# Altium PCB goalLight.PcbDoc
Units mil, origin at the board's own origin, x right, y up, seen from the top; angles counter-clockwise.
Board outline 6000 x 4000 mil, 2 copper layers (Top Layer, Bottom Layer); 32 components, 25 nets, 87 pads, 0 vias.
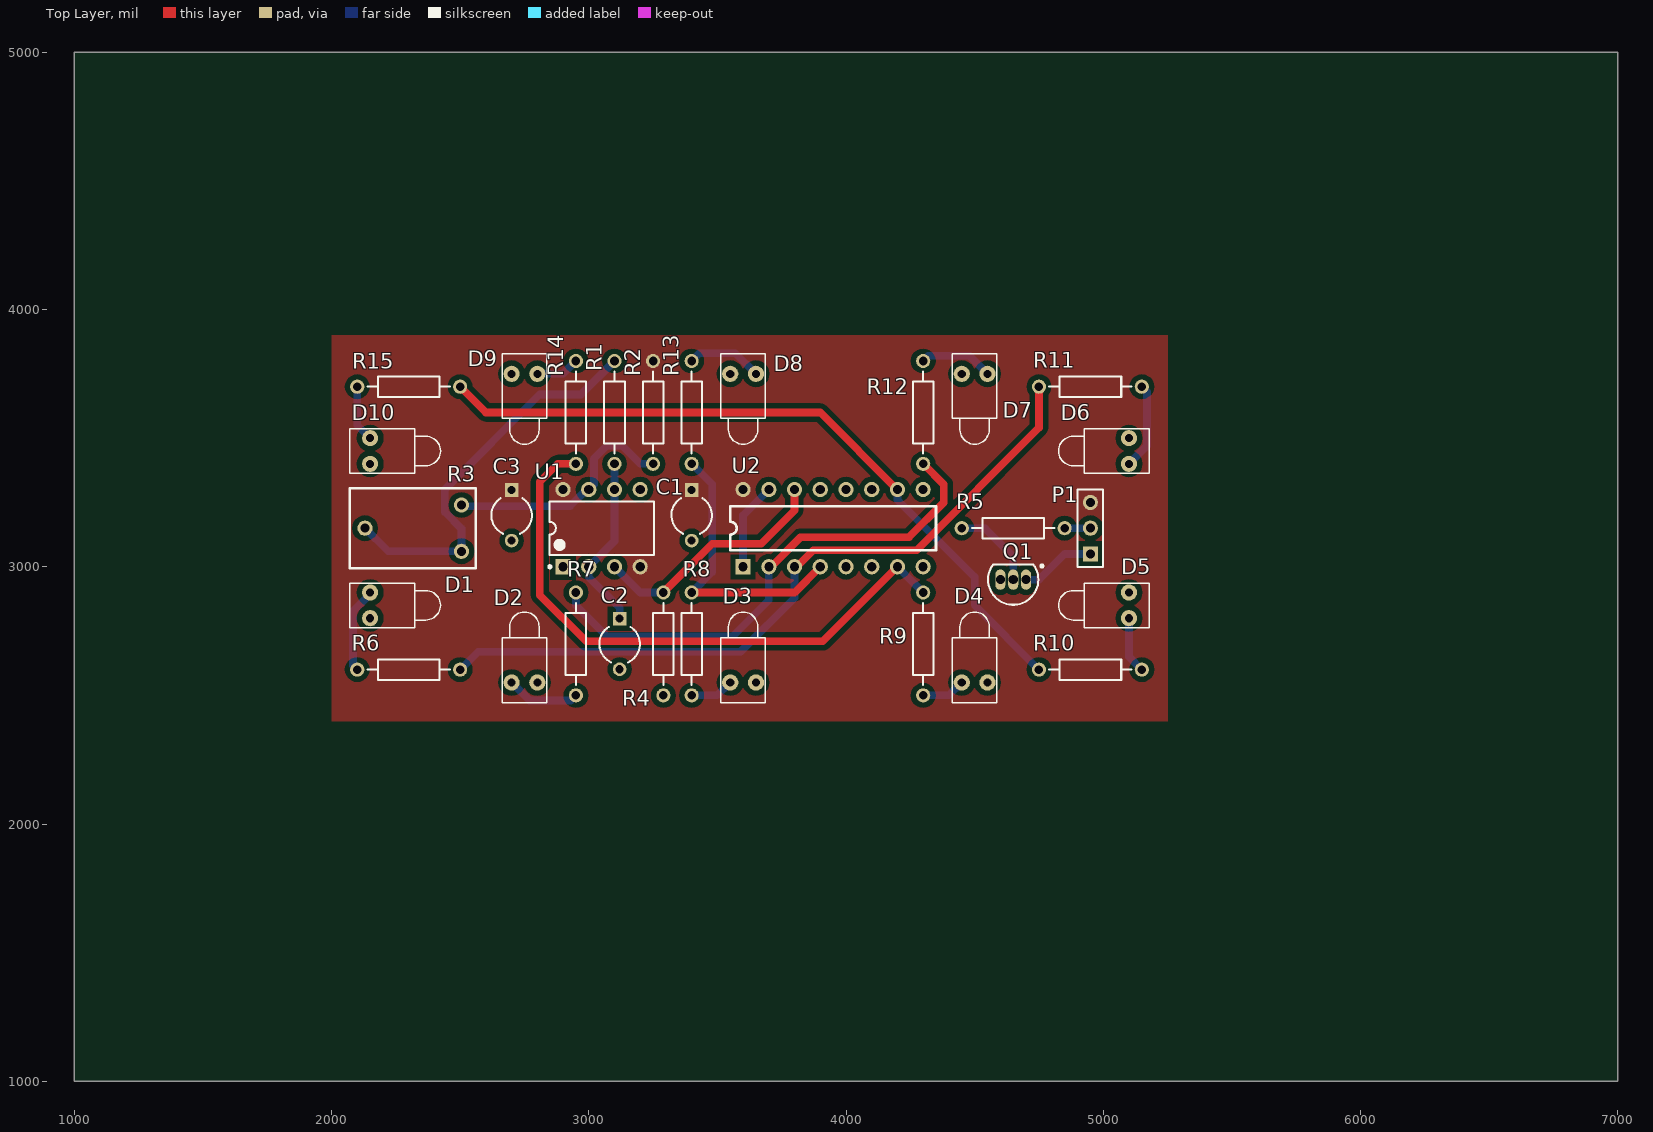
[diagram p0: Top Layer view]
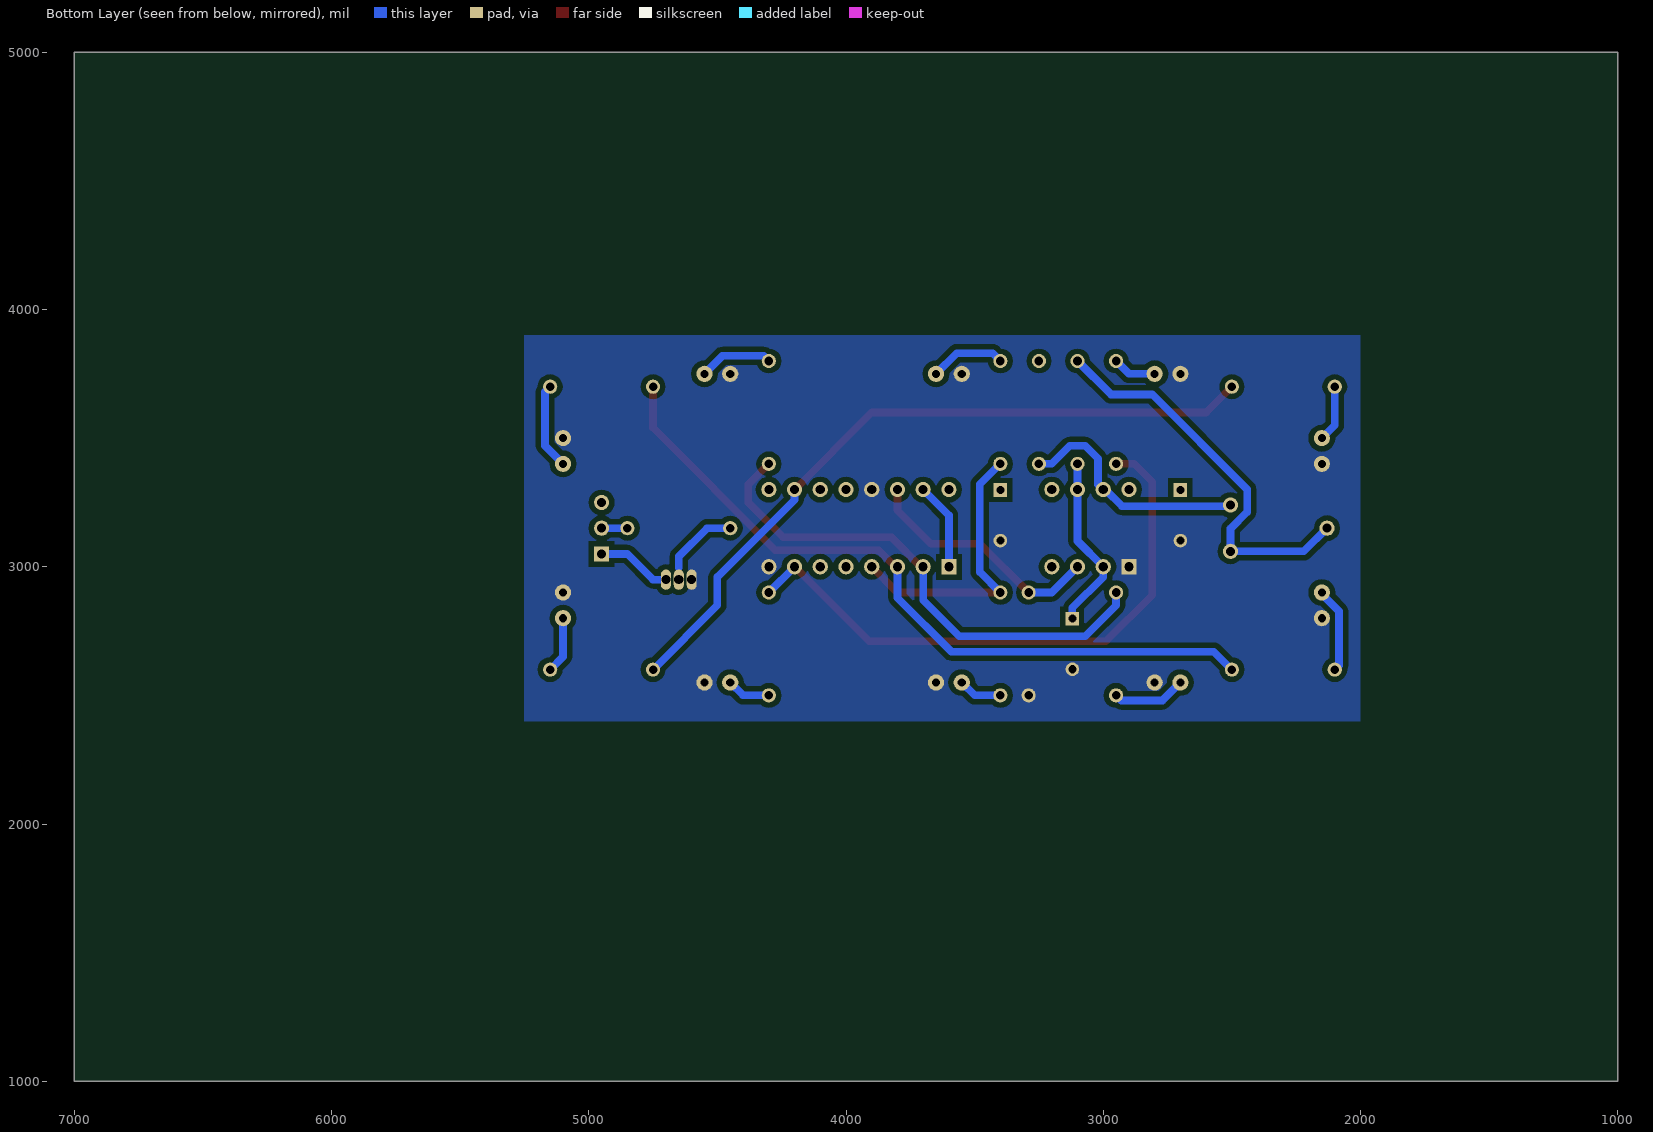
[diagram p1: Bottom Layer view, seen from below]

## Layer stack, top to bottom
Top Layer: signal copper 1.4
Dielectric: dielectric 12.6, FR-4, Dk 4.8
Bottom Layer: signal copper 1.4

## Board outline
1000,1000 7000,1000 7000,5000 1000,5000

## Design rules (kind name [scope] priority, off if disabled: settings)
Clearance [All] p1: gap=20
PlaneConnect [All] p1: planeconnectstyle=Direct reliefexpansion=20 reliefentries=4 reliefconductorwidth=10 reliefairgap=10
PolygonConnect [All] p1: connectstyle=Direct reliefconductorwidth=10 reliefentries=4 polygonreliefangle="90 Angle" airgapwidth=10
RoutingVias [All] p1: holewidth=28 width=50 viastyle="Through Hole" minholewidth=28 minwidth=50 maxholewidth=28 maxwidth=50
SilkscreenOverComponentPads [All] p1: minsilkscreentomaskgap=10
SolderMaskExpansion [All] p1: expansion=4
Width [All] p1: maxlimit=30 minlimit=30 preferedwidth=30
26 further rules are at their usual default settings.

## Components (designator, comment, footprint, x,y, rotation, side; value= is the part's Value field where it differs from the comment)
C1 "Cap2" CAPR5-4X5 3400,3200 r270 top
C2 "Cap2" CAPR5-4X5 3120,2700 r270 top
C3 "Cap2" CAPR5-4X5 2700,3200 r270 top
D1 "LED1" LED-1 2150,2850 r0 top
D2 "LED1" LED-1 2750,2550 r90 top
D3 "LED1" LED-1 3600,2550 r90 top
D4 "LED1" LED-1 4500,2550 r90 top
D5 "LED1" LED-1 5100,2850 r180 top
D6 "LED1" LED-1 5100,3450 r180 top
D7 "LED1" LED-1 4500,3750 r270 top
D8 "LED1" LED-1 3600,3750 r270 top
D9 "LED1" LED-1 2750,3750 r270 top
D10 "LED1" LED-1 2150,3450 r0 top
P1 "Header 3" HDR1X3 4950,3050 r90 top
Q1 "2N3904" TO-92A 4650,2950 r90 top
R1 "Res1" AXIAL-0.4 3100,3600 r270 top
R2 "Res1" AXIAL-0.4 3250,3600 r90 top
R3 "RPot-2" POT3 2450,3150 r270 top
R4 "Res1" AXIAL-0.4 3290,2700 r90 top
R5 "Res1" AXIAL-0.4 4650,3150 r0 top
R6 "Res1" AXIAL-0.4 2300,2600 r0 top
R7 "Res1" AXIAL-0.4 2950,2700 r90 top
R8 "Res1" AXIAL-0.4 3400,2700 r90 top
R9 "Res1" AXIAL-0.4 4300,2700 r90 top
R10 "Res1" AXIAL-0.4 4950,2600 r180 top
R11 "Res1" AXIAL-0.4 4950,3700 r180 top
R12 "Res1" AXIAL-0.4 4300,3600 r270 top
R13 "Res1" AXIAL-0.4 3400,3600 r270 top
R14 "Res1" AXIAL-0.4 2950,3600 r270 top
R15 "Res1" AXIAL-0.4 2300,3700 r0 top
U1 "LM555CN" N08E 3050,3150 r90 top
U2 "CD4017BE" N16 3600,3000 r90 top

## Footprints (in the part's own frame and the unit in brackets; to place one, negate y for a bottom-side part, rotate by r counter-clockwise, add the part's x,y. Pads: shape width x height; smd on the part's side, far side on the other; paste and mask are expansions set on the pad)
AXIAL-0.4 [mm] "Axial Device, Thru-Hole; 2 Leads; 0.4 in Pin Spacing"
  round 1.4 hole 0.85: 1(-5.08,0) 2(5.08,0)
  silkscreen extent -4.06,-1.02 4.06,1.02
CAPR5-4X5 [mm] "Capacitor; 2 Leads"
  rect 1.35x1.35 hole 0.8: 1(-2.5,0)
  round 1.35 hole 0.8: 2(2.5,0)
  silkscreen extent -1.69,-2 1.82,2
HDR1X3 [mm] "Connector; Header; 3 Position"
  rect 1.5x1.5 hole 0.9: 1(0,0)
  round 1.5 hole 0.9: 2(2.54,0) 3(5.08,0)
  silkscreen extent -1.27,-1.27 6.35,1.27
LED-1 [mm] "LED; 2 Leads"
  round 1.6 hole 0.8: 1(0,1.27) 2(0,-1.27)
  silkscreen extent -2,-2.2 6.95,2.2
N08E [mm] "DIP, 8-Leads, Row Spacing 7.62mm, Pitch 2.54mm, Body 9.91x6.35mm"
  rect 1.5x1.5 hole 0.9: 1(-3.81,3.81)
  round 1.5 hole 0.9: 2(-3.81,1.27) 3(-3.81,-1.27) 4(-3.81,-3.81) 5(3.81,-3.81) 6(3.81,-1.27) 7(3.81,1.27) 8(3.81,3.81)
  silkscreen extent -3.93,-5.15 2.65,5.23, body extent -3.6,-5.15 3.6,5.15, height 5.34
N16 [mm]
  rect 1.5x1.5 hole 0.9: 1(0,0)
  round 1.5 hole 0.9: 2(0,-2.54) 3(0,-5.08) 4(0,-7.62) 5(0,-10.16) 6(0,-12.7) 7(0,-15.24) 8(0,-17.78) 9(7.62,-17.78) 10(7.62,-15.24) 11(7.62,-12.7) 12(7.62,-10.16) 13(7.62,-7.62) 14(7.62,-5.08) 15(7.62,-2.54) 16(7.62,0)
  silkscreen extent 1.64,-19.05 5.98,1.27
POT3 [mm]
  round 1.5 hole 0.9: 1(-2.286,1.397) 2(2.286,1.397) 3(0,-8.128)
  silkscreen extent -3.95,-9.65 3.95,2.79
TO-92A [mm] "TO, Flat Index; 3 In-Line, Axial Leads; Body Dia. 4.5mm; Leads 0.51 x 0.48 mm (max)"
  oval 2x1 hole 0.9: 1(0,-1.27) 2(0,0) 3(0,1.27)
  silkscreen extent -2.48,-2.96 1.5,2.48, body extent -2.5,-2.5 1.5,2.5, height 6.86

## Part data
C1 C2 C3: "Capacitor"
D1 D2 D3 D4 D5 D6 D7 D8 D9 D10: "Typical RED GaAs LED"
P1: "Header, 3-Pin"
Q1: "NPN General Purpose Amplifier"
R1 R2 R4 R5 R6 R7 R8 R9 R10 R11 R12 R13 R14 R15: "Resistor"
R3: "Potentiometer"
U1: "Timer, 8-pin MDIP"
U2: "Decade Counter"

## Nets (pads, with @x,y where several pads share a name; then routed paths per layer and width w, separated by ;. In a path a pad name is that pad's centre, name@x,y a point inside that pad or via, vN(x,y) a via of type N, cw(c..) or ccw(c..) an arc to the next point about the centre after c; other vN are vias at no path point)
CGND: C1.2 C2.2 C3.2 D1.2 D2.2 D3.2 D4.2 D5.2 D6.2 D7.2 D8.2 D9.2 D10.2 Q1.3 R4.1 U1.1 U2.8 U2.13
GND: P1.1 Q1.1 | length 291.4
  Bottom Layer w30: Q1.1 4750,2950 4850,3050 P1.1
NetC2_1: C2.1 R1.2 U1.2 U1.6 | length 692.7
  Bottom Layer w30: R1.2 U1.6 3100,3100 U1.2 3000,2960 3120,2840 C2.1
NetD1_1: D1.1 R6.1 | length 334.4
  Bottom Layer w30: R6.1 2083.5,2616.5 2083.5,2827.54 2150,2894.04 D1.1
NetD2_1: D2.1 R7.1 | length 287.3
  Bottom Layer w30: D2.1 2770,2480 2930,2480 R7.1
NetD3_1: D3.1 R8.1 | length 170.7
  Bottom Layer w30: R8.1 3500,2500 D3.1
NetD4_1: D4.1 R9.1 | length 170.7
  Bottom Layer w30: R9.1 4400,2500 D4.1
NetD5_1: D5.1 R10.1 | length 220.7
  Bottom Layer w30: D5.1 5100,2650 R10.1
NetD6_1: D6.1 R11.1 | length 337.3
  Bottom Layer w30: D6.1 5170,3470 5170,3680 R11.1
NetD7_1: D7.1 R12.1 | length 287.3
  Bottom Layer w30: R12.1 4320,3820 4480,3820 D7.1
NetD8_1: D8.1 R13.1 | length 295.6
  Bottom Layer w30: R13.1 3430,3830 3570,3830 D8.1
NetD9_1: D9.1 R14.1 | length 170.7
  Bottom Layer w30: D9.1 2900,3750 R14.1
NetD10_1: D10.1 R15.1 | length 220.7
  Bottom Layer w30: R15.1 2100,3550 D10.1
NetP1_2: P1.2 R5.2 | length 100
  Bottom Layer w30: R5.2 P1.2
NetQ1_2: Q1.2 R5.1 | length 288.5
  Bottom Layer w30: R5.1 4540,3150 4650,3040 4650,2997.02
NetR1_1: R1.1 R3.2 R3.3 | length 1545.9
  Bottom Layer w30: R3.3 2220,3060 R3.2 2505,3148.74 2440.47,3213.27 2440.47,3300.47 2810,3670 2970,3670 R1.1
NetR2_1: R2.1 R3.1 U1.7 | length 922.8
  Bottom Layer w30: R3.1 2509.53,3235.47 2926.73,3235.47 U1.7@2991.26,3300 ; U1.7 3020,3320 3020,3420 3070,3470 3130,3470 3200,3400 R2.1
NetR4_2: R4.2 U1.3 U2.14 | length 954
  Top Layer w30: R4.2 3480,3090 3670,3090 3800,3220 U2.14
  Bottom Layer w30: U1.3 3200,2900 R4.2
NetR6_2: R6.2 R11.2 U2.3 | length 2869.7
  Top Layer w30: U2.3 3808.74,3000 3873.27,3064.53 4274.53,3064.53 4750,3540 R11.2
  Bottom Layer w30: R6.2 2570,2670 3590,2670 3800,2880 U2.3
NetR7_2: R7.2 R12.2 U2.2 | length 2004.4
  Top Layer w30: U2.2 3708.74,3000 3823.27,3114.53 4244.53,3114.53 4380,3250 4380,3320 R12.2
  Bottom Layer w30: R7.2 2950,2850 3070,2730 3560,2730 3700,2870 U2.2
NetR8_2: R8.2 R13.2 U2.4 | length 1108.3
  Top Layer w30: R8.2 3800,2900 U2.4
  Bottom Layer w30: R8.2 3480,2980 3480,3321.07 3401.07,3400 R13.2
NetR9_2: R9.2 R14.2 U2.7 | length 2335.1
  Top Layer w30: R14.2 2880,3400 2810,3330 2810,2890 2990,2710 3910,2710 U2.7
  Bottom Layer w30: U2.7 R9.2
NetR10_2: R10.2 R15.2 U2.10 | length 2793.5
  Top Layer w30: R15.2 2600,3600 3900,3600 U2.10
  Bottom Layer w30: U2.10 4200,3260 4500,2960 4500,2850 R10.2
NetU2_1: U2.1 U2.15 | length 341.4
  Bottom Layer w30: U2.1 3600,3200 U2.15
V5V: C1.1 C3.1 P1.3 R2.2 U1.4 U1.8 U2.16
pads on no net: U1.5 U2.5 U2.6 U2.9 U2.11 U2.12

## Polygon pours and split planes (outlines as drawn)
CGND on Bottom Layer "Bottom Layer-No Net" (solid, pour order 4): 2000,3900 2000,2400 5250,2400 5250,3900
V5V on Top Layer "Bottom Layer-No Net" (solid, pour order 6): 2000,3900 2000,2400 5250,2400 5250,3900

## Silkscreen, mask and mechanical layers (free items; w line width, h text height)
Mechanical 1:
  lines w10: 2000,2400 2000,3900 5250,3900 5250,2400 2000,2400